# Altium PCB 1050a.PcbDoc
Units mil, origin at the board's own origin, x right, y up, seen from the top; angles counter-clockwise.
Board outline 1500 x 775 mil, 3 copper layers (Top Layer, InternalPlane1, Bottom Layer); 43 components, 29 nets, 131 pads, 68 vias.
Unrouted connection lines stored in the file: 1.
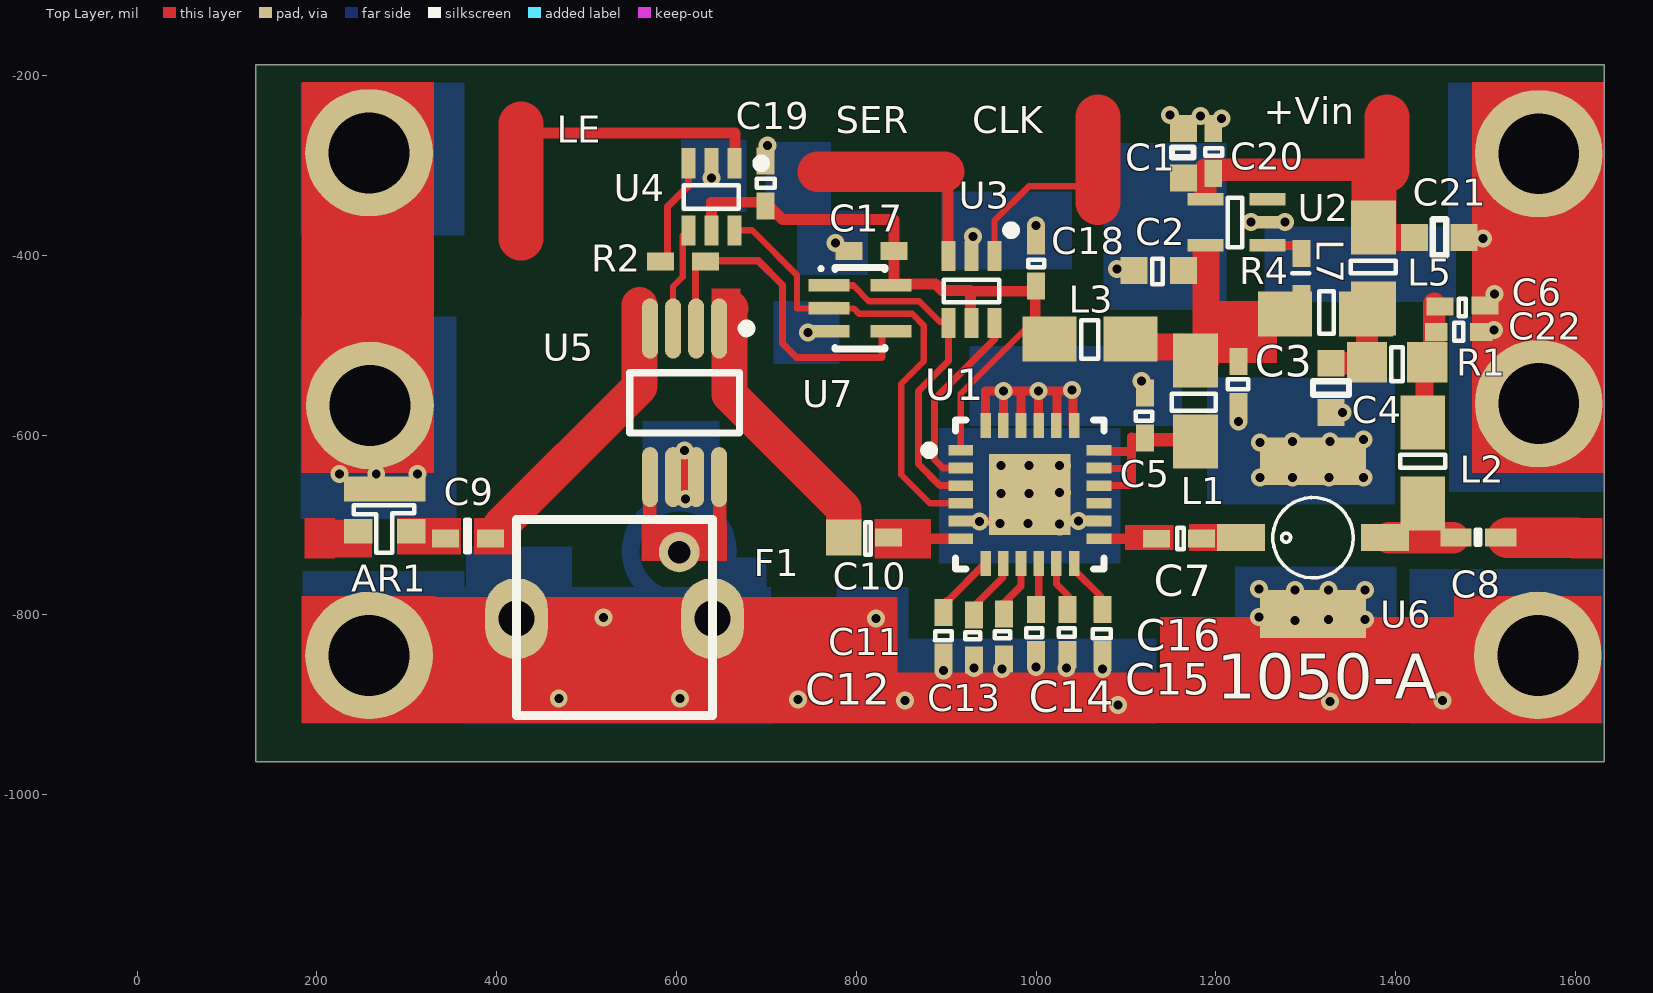
[diagram p0: Top Layer view]
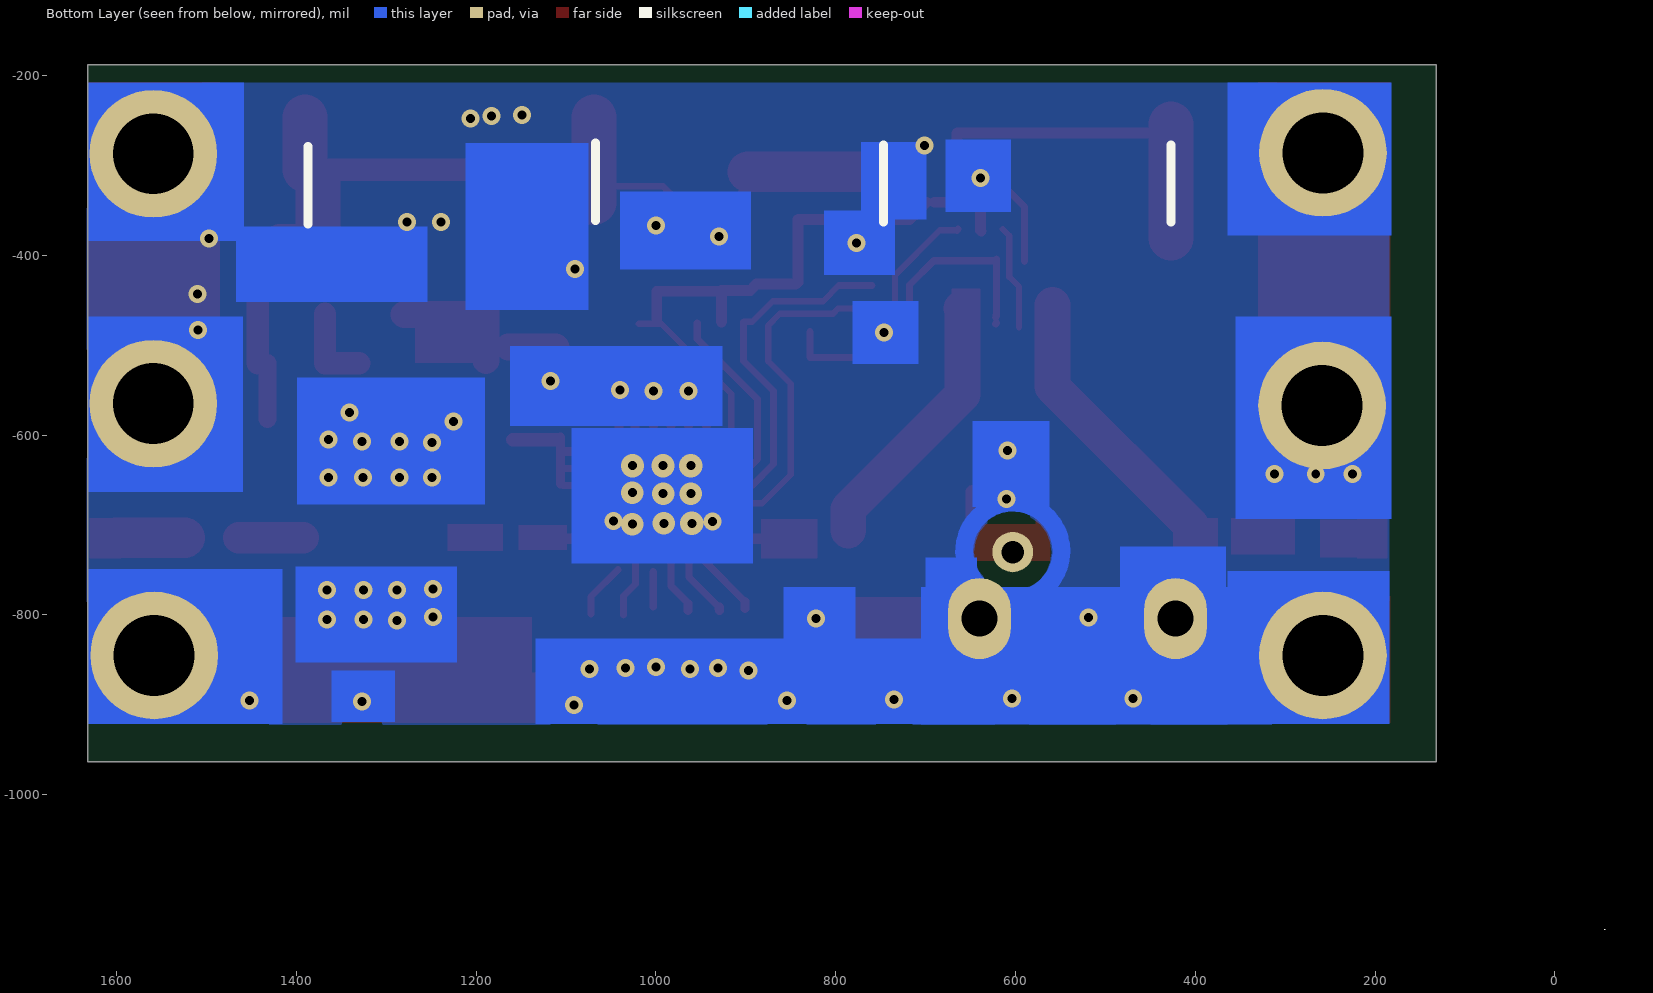
[diagram p1: Bottom Layer view, seen from below]
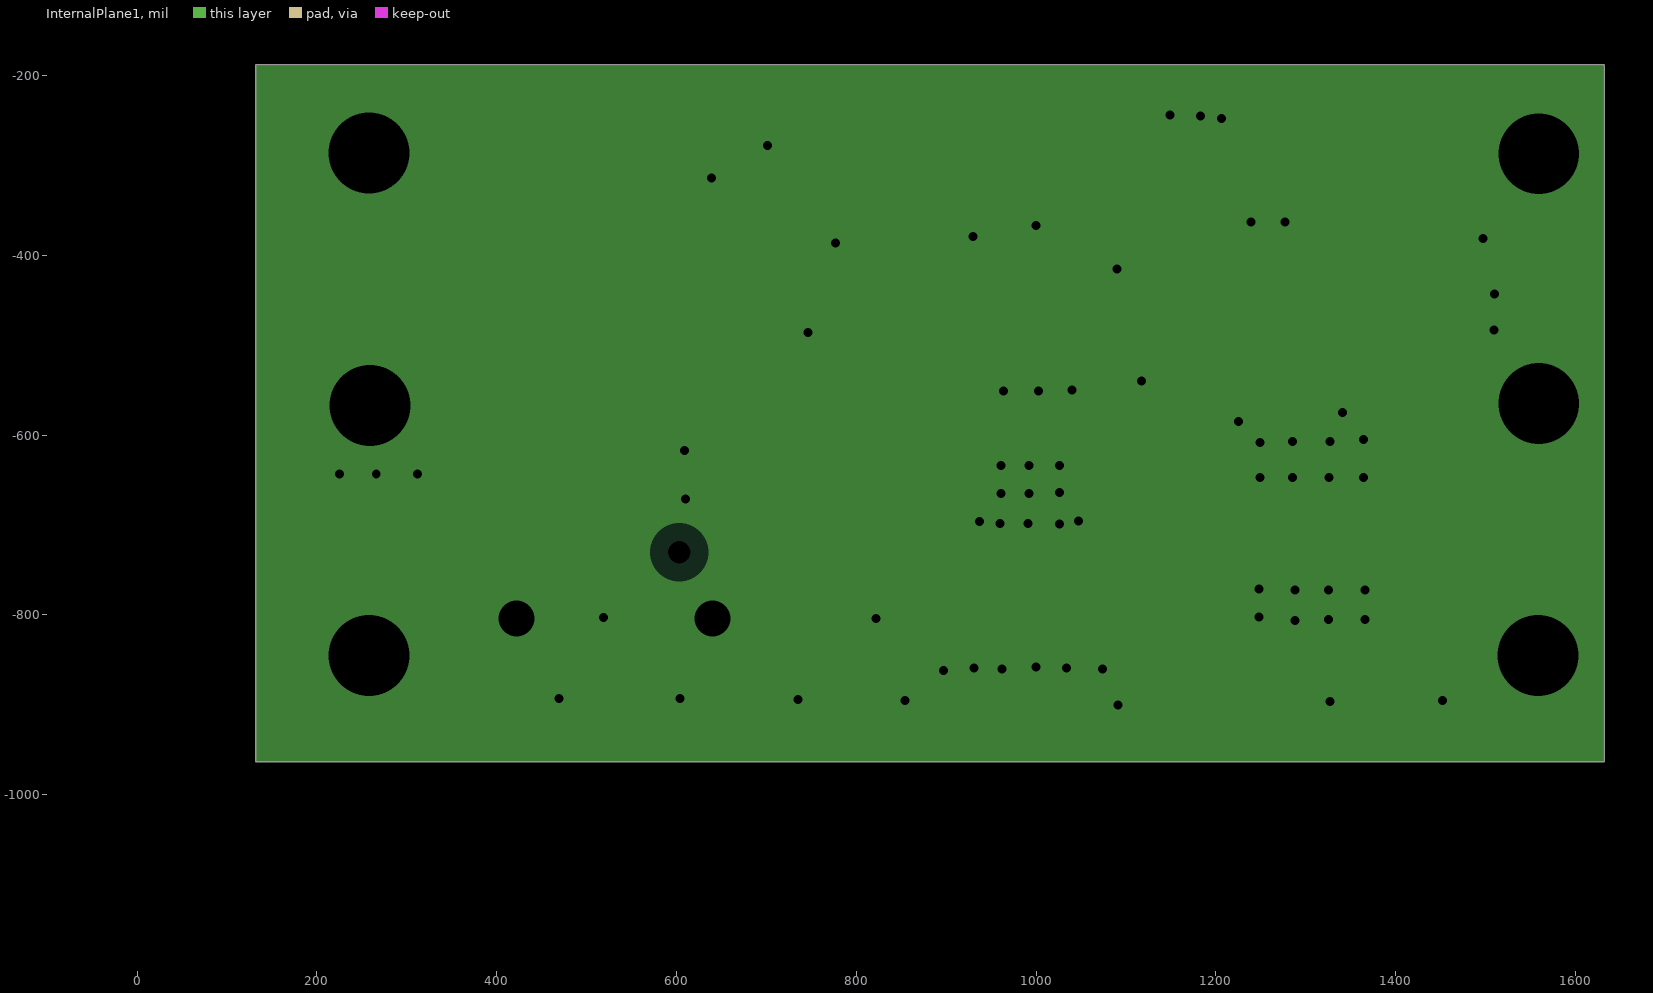
[diagram p2: InternalPlane1, clearances drawn from the general rule]

## Layer stack, top to bottom
Top Layer: signal copper 1.4
Dielectric: core 12.6, FR-4, Dk 4.8
InternalPlane1: plane copper 1.4, net GND
Dielectric: prepreg 12.6, FR-4, Dk 4.8
Bottom Layer: signal copper 1.4

## Board outline
132,-963 132,-188 1632,-188 1632,-963 132,-963

## Design rules (kind name [scope] priority, off if disabled: settings)
Clearance [OnLayer('Bottom Layer')] p1: gap=20
ComponentClearance [All] p1: gap=10 collisioncheckmode=3 verticalgap=15
PlaneClearance [All] p1: clearance=20
PlaneConnect [All] p1: planeconnectstyle=Relief reliefexpansion=20 reliefentries=4 reliefconductorwidth=10 reliefairgap=10
PolygonConnect [All] p1: connectstyle=Relief reliefconductorwidth=10 reliefentries=4 polygonreliefangle="90 Angle"
RoutingVias [All] p1: holewidth=10 width=20 viastyle="Through Hole" minholewidth=10 minwidth=20 maxholewidth=28 maxwidth=50
SolderMaskExpansion [All] p1: expansion=4
TestPointUsage [All] p1: valid=0 allowmultiple=FALSE
Testpoint [All] p1: side=15 testpointundercomponent=TRUE minsize=40 maxsize=100 preferedsize=60 minholesize=0 maxholesize=40 preferedholesize=32 testpointgrid=1 style=1023 order=0123456789
Width [All] p1: maxlimit=300 minlimit=5 preferedwidth=10 minimp=50.000000 maximp=50.000000 favimp=50.000000
16 further rules are at their usual default settings.

## Components (designator, comment, footprint, x,y, rotation, side; value= is the part's Value field where it differs from the comment)
AR1 "6db" PAT1220 246,-707 r0 top
b3 "" FEEDTHOU6-32 750,80 r0 top
b4 "" FEEDTHOU6-32 1070,82 r0 top
b5 "" FEEDTHOU6-32 1390,78 r0 top
b6 "" FEEDTHOU6-32 430,80 r0 top
C1 "1uf" 0603#1 1164,-314 r90 top
C2 "1uf" 0603#1 1164,-417 r180 top
C3 "0.01" 0402#1 1225,-518 r270 top
C4 "1uf" 0603#1 1328,-520 r270 top
C5 "0.01" 0402#1 1121,-603 r90 top
C6 "0.01" 0402#2 1449,-456 r0 top
C7 "100pf" 0402#3 1134,-715.21 r0 top
C8 "100pf" 0402#4 1467,-714 r0 top
C9 "100pf" 0402#1 343,-715 r0 top
C10 "100pf" 0402#5 786,-714 r0 top
C11 "220pf" 0402#1 897,-797 r270 top
C12 "220pf" 0402#1 931,-800 r270 top
C13 "220pf" 0402#1 964,-799 r270 top
C14 "220pf" 0402#1 1000,-794 r270 top
C15 "220pf" 0402#1 1035,-794 r270 top
C16 "220pf" 0402#1 1074,-794 r270 top
C17 "0.01" 0402#1 792,-395 r0 top
C18 "0.01" 0402#1 1000,-434 r90 top
C19 "0.01" 0402#1 699,-345 r90 top
C20 "0.01" 0402#1 1197,-309 r90 top
C21 "" 0603#1 1421,-380 r0 top
C22 "68pf" 0402#6 1445,-485 r0 top
F1 "TSA630-20M" TEMWELL5W 460,-874 r0 top locked
L1 "L" 0805 1177,-517 r270 top
L2 "22nh" 0805 1430,-586 r270 top
L3 "L" 0805 1015,-493 r0 top
L5 "L" 0805 1375,-369 r270 top
L7 "" 0805 1367,-465 r180 top
R1 "27" 0603#2 1435,-519 r180 top
R2 "0 ohm" 0402#1 632,-407 r180 top
R4 "100K" 0402#1 1295,-398 r270 top
U1 "HMC624" QFN50P400X400-24W2L 993,-666 r0 top
U2 "TPS79733" SC70-5#1 1223,-363 r90 top
U3 "74LVC2G14" SOT363-6N 928,-438 r270 top
U4 "74LVC2G14" SOT363-6N 639,-335 r270 top
U5 "hmc199" TSOP65P490-8AN 609,-564 r270 top
U6 "3386" "SOT-86(MICO X)" 1243,-714 r90 top
U7 "74LVC1G79" SC70-5#2 804,-459 r270 top

## Footprints (in the part's own frame and the unit in brackets; to place one, negate y for a bottom-side part, rotate by r counter-clockwise, add the part's x,y. Pads: shape width x height; smd on the part's side, far side on the other; paste and mask are expansions set on the pad)
0402#1 [mil]
  rect 30x20 smd: 1(0,0) 2(50,0)
0402#2 [mil]
  rect 30x20 smd: 1(0,-1) 2(50,0)
0402#3 [mil]
  rect 30x20 smd: 1(0,0) 2(50,0.21)
0402#4 [mil]
  rect 35x20 smd: 1(0,0) 2(50,0)
0402#5 [mil]
  rect 40x40 smd: 1(0,0)
  rect 30x20 smd: 2(50,0)
0402#6 [mil]
  rect 25x20 smd: 1(0,0) 2(50,0)
  silkscreen extent 20,-10 30,10
0603#1 [mil]
  rect 30x30 smd: 1(0,0) 2(55,0)
  silkscreen extent 23,-11 34,13
0603#2 [mil]
  rect 45x45 smd: 1(0,0) 2(67,0)
0805 [mil]
  rect 60x50 smd: 1(0,0) 2(90,0)
FEEDTHOU6-32 [mil]
PAT1220 [mm] "thin firm chip attenuator"
  rect 0.8x0.7 smd: 1(0,0) 3(1.5,0)
  rect 2.3x0.7 smd: 2(0.75,1.2)
QFN50P400X400-24W2L [mm] "QFN, 24-Leads, Body 4x4mm, Pitch 0.5mm, IPC High Density"
  rect 0.7x0.3 smd: 1(-1.95,1.25) 2(-1.95,0.75) 3(-1.95,0.25) 4(-1.95,-0.25) 5(-1.95,-0.75) 6(-1.95,-1.25) 13(1.95,-1.25) 14(1.95,-0.75) 15(1.95,-0.25) 16(1.95,0.25) 17(1.95,0.75) 18(1.95,1.25)
  rect 0.3x0.7 smd: 7(-1.25,-1.95) 8(-0.75,-1.95) 9(-0.25,-1.95) 10(0.25,-1.95) 11(0.75,-1.95) 12(1.25,-1.95) 19(1.25,1.95) 20(0.75,1.95) 21(0.25,1.95) 22(-0.25,1.95) 23(-0.75,1.95) 24(-1.25,1.95)
  rect 2.3x2.3 smd: 25(0,0)
  silkscreen extent -2.97,-2.1 2.1,2.1, body extent -2.07,-2.07 2.07,2.07, height 0.8
SC70-5#1 [mm] "SOT-353/SC-88A; 5 Leads; Body 2.2 x 2.4 mm, inc. leads (LxW max)"
  rect 0.35x1.016 smd: 1(-0.65,-0.875) 2(0,-0.875) 3(0.65,-0.875) 4(0.65,0.875) 5(-0.65,0.875)
SC70-5#2 [mm] "SOT-353/SC-88A; 5 Leads; Body 2.2 x 2.4 mm, inc. leads (LxW max)"
  rect 0.35x1.15 smd: 1(-0.65,-0.875) 2(0,-0.875) 3(0.65,-0.875) 4(0.65,0.875) 5(-0.65,0.875)
  silkscreen extent -1.17,-1.15 1.15,0.7
SOT363-6N [mm] "SOT363, 6-Leads, Body 2x1.3mm, Pitch 0.65mm, Lead Span 2.1mm, IPC Medium Density"
  rect 0.85x0.4 smd: 1(-0.95,0.65) 2(-0.95,0) 3(-0.95,-0.65) 4(0.95,-0.65) 5(0.95,0) 6(0.95,0.65)
  silkscreen extent -1.8,1 -1.55,1.24, body extent -0.7,-1.1 0.7,1.1, height 1
"SOT-86(MICO X)" [mil]
  rect 30x53.15 smd: 1(0,15) 3(0,-145)
  rect 53.15x118.11 smd: 2(-85,-65) 4(85,-65)
  silkscreen extent -45,-110 45,-20
TEMWELL5W [mil]
  oval 70x90 hole 40: 0(-38,70) 0(180,70)
  round 45 hole 25: 2(143,144)
  silkscreen extent -38,-38 180,180
TSOP65P490-8AN [mm] "TSOP, 8-Leads, Body 3x3mm, Pitch 0.65mm, IPC Medium Density"
  oval 1.702x0.45 smd: 1(-2.1,0.975) 2(-2.1,0.325) 3(-2.1,-0.325) 4(-2.1,-0.975) 5(2.1,-0.975) 6(2.1,-0.325) 7(2.1,0.325) 8(2.1,0.975)
  silkscreen extent -2.22,-1.55 0.85,1.88, body extent -1.6,-1.6 1.6,1.6, height 1.1

## Free pads (board coordinates)
  round 142 hole 90: 0(1559,-565) 1(258,-845) 1(1558,-845) 5(1559,-287) 6(258,-286) 6(259,-567)

## Via types
v1: diameter 20, hole 10, Top Layer to Bottom Layer, 59 vias
v2: diameter 25, hole 10, Top Layer to Bottom Layer, 5 vias
v3: diameter 25.98, hole 10, Top Layer to Bottom Layer, tented top, 4 vias

## Nets (pads, with @x,y where several pads share a name; then routed paths per layer and width w, separated by ;. In a path a pad name is that pad's centre, name@x,y a point inside that pad or via, vN(x,y) a via of type N, cw(c..) or ccw(c..) an arc to the next point about the centre after c; other vN are vias at no path point)
GND: AR1.2 C1.2 C2.2 C3.2 C4.2 C5.2 C6.2 C11.2 C12.2 C13.2 C14.2 C15.2 C16.2 C17.1 C18.2 C19.2 C20.2 C21.2 C22.2 F1.0 pad.0 pad.1 pad.5 pad.6 U1.5 U1.14 U1.19 U1.20 U1.21 U1.22 U1.23 U1.24 U1.25 U2.2 U3.2 U4.2 U5.6 U5.7 U6.2 U6.4 U7.3 | length 875.2
  Top Layer w10: v1(937,-696) U1.25@954,-696 ; U1.24 943.79,-551 1041.21,-551 U1.19@1041.21,-590.79 ; U1.23 v1@963.47,-545.74 ; 983,-551 U1.22 ; U1.21 v1@1002.84,-546.06 ; U1.20@1023,-593.54 1023,-551 ; 1073,-873 C16.2@1073,-843
  Top Layer w12: U1.25@1037,-695 U1.14@1070.3,-695
  Top Layer w40: 405,-882 F1.0@405,-831 ; 624,-895 F1.0@624,-830
  Bottom Layer w20: 656.96,-726.75 ccw(c603,-729) 657,-730.08
  other v1: 1091,-900 1327,-896 854,-895 1452,-895 735,-894 469,-893 604,-893 897,-862 962,-860 1074,-860 931,-859 1034,-859 1000,-858 1288,-806 1325,-805 1366,-805 822,-804 519,-803 1248,-802 1288,-772 1325,-772 1366,-772 1248,-771 1047,-695.53 610,-671 1249,-647 1285,-647 1326,-647 1364,-647 225,-643 266,-643 312,-643 609,-617 1249,-608 1285,-607 1327,-607 1364,-605 1225,-585 1341,-575 963.47,-551 1002.84,-551 1040,-550 1117,-540 746,-486 1509,-483 1510,-443 1090,-415 777,-386 1497,-381 930,-379 1000,-367 1239,-363 1277,-363 639,-314 701,-278 1206,-248 1183,-245 1149,-244
  other v2: 1026,-699 991,-698 961,-665 992,-665 1026,-664
  other v3: 960,-698 961,-634 992,-634 1026,-634
NetAR1_1: AR1.1
NetAR1_3: AR1.3 C9.1
NetC5_1: C5.1 L1.2 U1.16 U1.17 U1.18 | length 204.1
  Top Layer w8: U1.16@1069.77,-656 1104,-656 ; U1.17@1069.77,-637 1104,-637
  Top Layer w10: U1.18@1069.56,-618 1103,-618 ; 1106,-654.16 1106,-602
  Top Layer w15: 1109,-605 L1.2@1159,-605
NetC6_1: C6.1 C22.1 L2.1 R1.1 | length 128
  Top Layer w20: L2.1@1432,-582 R1.1@1432,-520
  Top Layer w25: R1.1@1443,-520 C6.1@1443,-454
NetC7_1: C7.1 U1.13 | length 67.2
  Top Layer w12: U1.13 C7.1@1137,-715
NetC7_2: C7.2 U6.1
NetC8_1: C8.1 L2.2 U6.3 | length 72
  Top Layer w35: U6.3@1392,-714 C8.1@1464,-714
NetC8_2: C8.2 | length 77
  Top Layer w45: C8.2@1524,-714 1601,-714
NetC9_2: C9.2 U5.4 | length 317.2
  Top Layer w40: C9.2@404,-708 404,-701 559,-546 559,-455
NetC10_1: C10.1 U5.1 | length 300
  Top Layer w40: 660,-459 659,-460 659,-555 786,-682 C10.1@786,-706
NetC10_2: C10.2 U1.6 | length 64
  Top Layer w12: 852.23,-715.21 U1.6
NetC11_1: C11.1 U1.7 | length 68.8
  Top Layer w8: C11.1@901,-785 U1.7@944,-742
  Top Layer w10: C11.1@901,-793 C11.1@901,-785
NetC12_1: C12.1 U1.8 | length 67.7
  Top Layer w8: C12.1@930,-791 963,-758 U1.8@963,-744
  Top Layer w10: C12.1@929,-795 929,-791 930,-791 C12.1@930,-793
NetC13_1: C13.1 U1.9 | length 58.9
  Top Layer w8: C13.1@964,-787 983,-768 U1.9@983,-744
  Top Layer w10: C13.1@964,-795 C13.1@964,-787
NetC14_1: C14.1 U1.10 | length 39
  Top Layer w8: C14.1@1003,-791 U1.10@1003,-752
NetC15_1: C15.1 U1.11 | length 62.8
  Top Layer w8: U1.11 1022.53,-765.53 1036,-779 C15.1@1036,-800
NetC16_1: C16.1 U1.12 | length 61.6
  Top Layer w8: U1.12@1042.21,-749.77 1072,-779.56 C16.1@1072,-799
NetF1_2: F1.2 U5.5 U5.8 | length 119.3
  Top Layer w15: U5.5@570,-662 570.39,-723.32 ; 648,-721 U5.8@648,-663
NetR4_1: R4.1 U2.1 | length 23
  Top Layer w10: U2.1@1270,-389 R4.1@1293,-389
NetU1_2: U1.2 U3.6 | length 212.5
  Top Layer w8: U1.2 896.47,-636.47 887,-627 887,-560 954,-493 U3.6@954,-475.4
NetU1_3: U1.3 U3.4 U7.1 | length 388.7
  Top Layer w7: 796.41,-433.41 814,-451 870,-451 893,-474 U3.4@902.41,-474
  Top Layer w8: U7.1@759.55,-433.41 796.41,-433.41 ; U3.4@902.41,-474 902.41,-517.59 869,-551 869,-632 893.16,-656.16 U1.3
NetU1_4: U1.4 U4.6 U7.2 | length 532.8
  Top Layer w7: U4.6@665,-372 684,-372 734,-422 734,-459 797,-459 803,-465 862,-465 875,-478 875,-518 850,-543 850,-644 881.84,-675.84 U1.4
  Top Layer w8: U4.6@664,-371 U4.6@665,-372
NetU4_3: R2.1 R2.2 U4.3 U5.2 U7.4 | length 502.1
  Top Layer w8: R2.2@590,-407 590,-346 613.41,-322.59 U4.3 ; U5.2@621,-475 U5.2@622,-476 ; U5.2@621,-465.53 U5.2@621.8,-466.32 ; R2.1@621,-404 621,-468 U5.2@622,-469 ; R2.1@625,-406 691,-406 718,-433 718,-498 733.55,-513.55 828.45,-513.55 U7.4@828.45,-484.59
NetU4_4: U4.4 U5.3 | length 116.5
  Top Layer w7: U5.3@596,-480 596,-435 607,-424 607,-378 U4.4@614,-371
VCC: C17.2 C18.1 C19.1 L3.1 U1.1 U3.5 U4.5 U7.5 | length 729.3
  Top Layer w7: U1.1@916,-616 916,-554 994,-476 L3.1@1019,-476
  Top Layer w12: U4.5@638,-373 639,-372 639,-341 C19.1@690,-341 ; C19.1@699,-341 718,-360 842,-360 842,-430 844,-432 888,-432 895,-439 927,-439 U3.5@927,-474 ; 927,-440 999,-440 L3.1@999,-472
VDD: C2.1 C3.1 L1.1 L3.2 L7.2 R4.2 U2.5 | length 255
  Top Layer w30: L3.2@1111,-502 L1.1@1164,-502 ; L1.1@1189,-517 1189,-398 ; 1197,-466 L7.2@1280,-466
VDD-A: C4.1 L5.2 L7.1 R1.2 | length 93
  Top Layer w25: C4.1@1330,-520 1368,-520 L5.2@1368,-465
VIN: C1.1 C20.1 C21.1 L5.1 U2.4 | length 370
  Top Layer w25: U2.4@1188,-332 1188,-305 1390,-305
  Top Layer w30: L5.1@1389,-380 C21.1@1419,-380
  Top Layer w50: L5.1@1376,-373 1376,-321 ; 1390,-305 1390,-246
pads on no net: U1.15 U2.3 U3.1 U3.3 U4.1
copper on no net: | length 913.9
  Top Layer w7: 953.59,-400.6 953.59,-361.41 992,-323 1068,-323
  Top Layer w12: 418,-251 424,-245 443,-264 665,-264 665,-299 ; 902,-400 902,-311
  Top Layer w45: 757,-307 898,-307
  Top Layer w50: 427,-381 427,-254 ; 1069,-341 1069,-246

## Polygon pours and split planes (outlines as drawn)
GND on Bottom Layer "Top Layer-No Net" (solid, remove dead copper, pour order 1000): 183,-922 184,-921 184,-208 1633,-208 1633,-922 183,-922
GND on InternalPlane1 (split plane): 1631.95,-962.95 132.05,-962.95 132.05,-188.05 1631.95,-188.05

## Other copper
Top Layer:
  rectangle net VDD: 1194,-520 1268,-470
  rectangle net GND: 183,-642 330,-207
  rectangle net GND: 183,-920 332,-779
  rectangle net NetC10_1: 639,-494 671,-437
  rectangle net GND: 600,-671 624,-620
  rectangle net NetF1_2: 561,-740 656,-699
  rectangle net GND: 1485,-642 1632,-207
  rectangle net GND: 290,-920 1494,-864
  rectangle net NetC7_2: 1170,-729 1232,-699
  rectangle net NetAR1_1: 202,-736 261,-694
  rectangle net NetAR1_3: 289,-733 360,-692
  rectangle net NetC8_2: 1595,-737 1630,-692
  rectangle net NetAR1_1: 186,-737 220,-692
  rectangle net GND: 1465,-920 1629,-779
  rectangle net NetC10_2: 820,-737 883,-693
  rectangle net NetC7_1: 1099,-728 1153,-700
  rectangle net GND: 290,-885 846,-780
  rectangle net GND: 1138,-874 1487,-802
  rectangle net NetC9_2: 375,-733 425,-692
Bottom Layer:
  rectangle net GND: 184,-921 364,-751
  rectangle net GND: 364,-922 705,-769
  rectangle net GND: 366,-787 484,-724
  rectangle net GND: 562,-680 648,-584
  rectangle net GND: 182,-693 355,-468
  rectangle net GND: 182,-378 364,-208
  rectangle net GND: 605,-352 678,-271
  rectangle net GND: 699,-360 772,-274
  rectangle net GND: 734,-422 813,-350
  rectangle net GND: 894,-416 1040,-329
  rectangle net GND: 708,-521 781,-451
  rectangle net GND: 926,-590 1162,-501
  rectangle net GND: 1075,-461 1212,-275
  rectangle net GND: 1254,-452 1467,-368
  rectangle net GND: 1190,-677 1399,-536
  rectangle net GND: 892,-743 1094,-592
  rectangle net GND: 1221,-853 1401,-746
  rectangle net GND: 1290,-919 1361,-862
  rectangle net GND: 692,-921 1134,-826
  rectangle net GND: 778,-840 858,-769
  rectangle net GND: 1415,-921 1632,-749
  rectangle net GND: 1459,-663 1632,-468
  rectangle net GND: 1458,-384 1633,-208
  rectangle net GND: 643,-810 700,-736

## Silkscreen, mask and mechanical layers (free items; w line width, h text height)
Top Overlay:
  lines w5: 887,-828 906,-828 906,-818 888,-818 888,-828 ; 1129,-432 1129,-404 1141,-404 1141,-432 1130,-432 ; 1151,-573 1200,-573 1200,-554 1151,-554 1151,-572 ; 1285,-420 1304,-420 ; 1395,-540 1395,-502 1408,-502 1408,-540 1396,-540 ; 241,-688 241,-678 308,-678 308,-687 284,-687 284,-731 266,-731 266,-688 241,-688 ; 365,-730 365,-694 367,-694 370,-694 370,-730 365,-730 ; 608,-348 669,-348 669,-322 608,-322 608,-348 ; 810,-733 810,-697 816,-697 816,-733 810,-733 ; 897,-452 959,-452 959,-427 897,-427 897,-452 ; 921,-827 938,-827 938,-819 921,-819 921,-827 ; 954,-826 971,-826 971,-821 971,-818 954,-818 954,-826 ; 989,-825 1007,-825 1007,-815 989,-815 989,-825 ; 991,-413 1009,-413 1009,-405 991,-405 991,-413 ; 1025,-824 1043,-824 1043,-815 1025,-815 1025,-824 ; 1050,-515 1050,-472 1069,-472 1069,-515 1050,-515 ; 1063,-826 1083,-826 1083,-816 1063,-816 1063,-826 ; 1111,-584 1129,-584 1129,-574 1111,-574 1111,-584 ; 1157,-727 1157,-703 1164,-703 1164,-727 1157,-727 ; 1188,-289 1207,-289 1207,-281 1188,-281 1188,-289 ; 1213,-549 1236,-549 1236,-538 1213,-538 1213,-549 ; 1213,-391 1229,-391 1229,-336 1225,-336 1213,-336 1213,-391 ; 1315,-487 1331,-487 1331,-440 1328,-440 1315,-440 1315,-487 ; 1350,-420 1400,-420 1400,-406 1350,-406 1350,-420 ; 1405,-636 1455,-636 1455,-622 1405,-622 1405,-636 ; 1470,-468 1470,-448 1478,-448 1478,-468 1470,-468 ; 1489,-722 1489,-705 1494,-705 1494,-722 1489,-722
  text "+Vin" at 1253,-254 h30
  text "SER" at 777,-264 h30
  text "CLK" at 929,-264 h30
  text "LE" at 467,-275 h30
  text "1050-A" at 1201,-893 h50
Bottom Overlay:
  lines w1: -56,-1150 -55,-1150
Mechanical 1:
  lines w2: 183,-922 1633,-922 1633,-208 183,-208 183,-922
Drill Drawing:
  lines w5: 0,-245 1736,-245 ; 95,-715 1628,-715 ; 122,-287 1559,-287 ; 136,-845 1558,-845 ; 162,-567 1558,-567 ; 259,-865 259,-169 ; 1558,-965 1558,-300 ; -6,-1067 1819,-1067 1819,-22 -6,-22 -6,-1067 ; 181,-922 181,-209 1632,-209 1632,-922 181,-922

## Dimensions
183,-922 to 1633,-922 on Bottom Overlay
1558,-845 to 1633,-922 on Drill Drawing
258,-845 to 183,-922 on Drill Drawing
1558,-845 to 1633,-922 on Drill Drawing
1559,-287 to 1633,-208 on Drill Drawing
1558,-845 to 1601,-714 on Drill Drawing
258,-845 to 1558,-845 on Drill Drawing
-6,-1067 to 1819,-1242 on Drill Drawing
-6,-1067 to -6,-22 on Drill Drawing
1558,-845 to 1559,-565 on Drill Drawing
259,-567 to 258,-286 on Drill Drawing
183,-208 to 183,-922 on Drill Drawing
95,-715 to -6,-1067 on Drill Drawing
-6,-22 to 95,-208 on Drill Drawing
183,-922 to -6,-1067 on Drill Drawing